# Altium PCB slave-14-mc33775.PcbDoc (part 3 of 5)
Units mil, origin at the board's own origin, x right, y up, seen from the top; angles counter-clockwise.
Board outline 6512.5 x 4562.01 mil, 6 copper layers (Top Copper, Supply, Signal Layer 1, Signal Layer 2, GND, Bot Copper), stack 69.773 mil thick; 427 components, 0 nets, 1131 pads, 1672 vias.
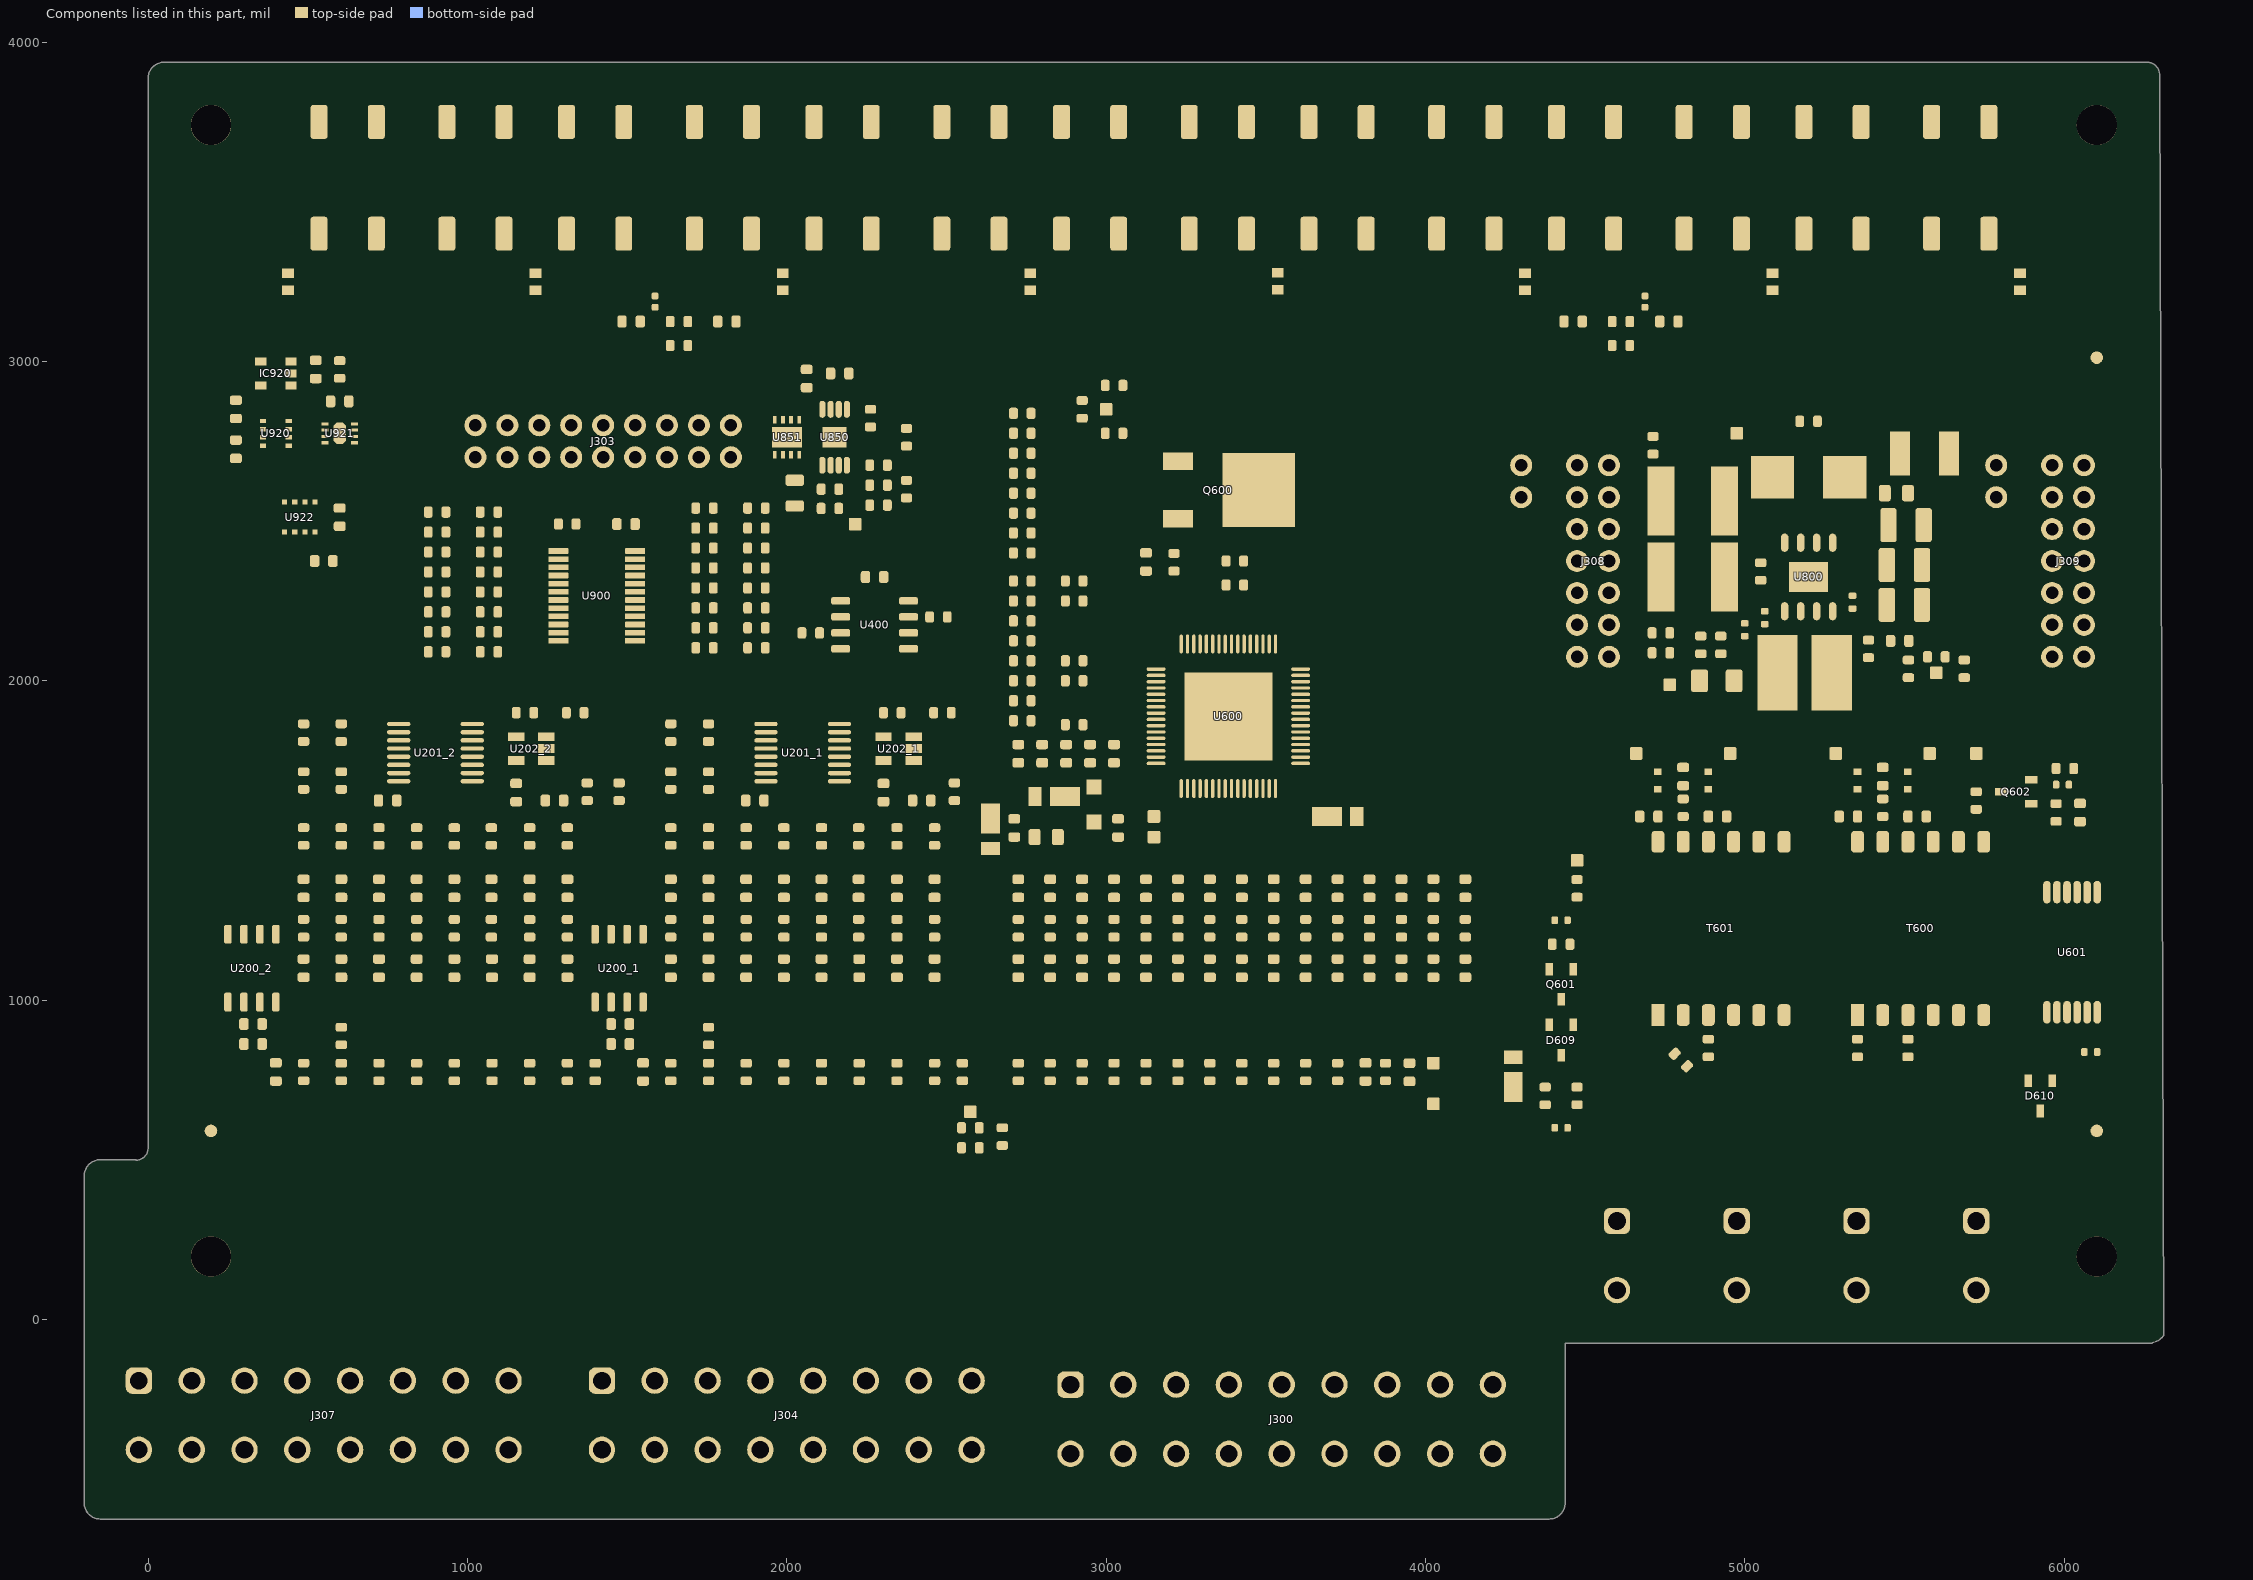
[diagram p7: the components of this part, seen from the top]

## Via types
v1: diameter 23.62, hole 15.75, Top Copper to Bot Copper, 1585 vias
v2: diameter 19.68, hole 11.81, Top Copper to Bot Copper, 87 vias

## Nets (pads, with @x,y where several pads share a name; then routed paths per layer and width w, separated by ;. In a path a pad name is that pad's centre, name@x,y a point inside that pad or via, vN(x,y) a via of type N, cw(c..) or ccw(c..) an arc to the next point about the centre after c; other vN are vias at no path point) (continued)
copper on no net: | length 362824.7
  Top Copper w8: 359.65,2736.61 345.8,2736.61 344.92,2737.5 v2(312.5,2737.5) 330.86,2755.86 330.86,2761.96 356.69,2787.8 359.65,2787.8 ; 440.35,2813.39 454.2,2813.39 455.08,2812.5 v2(487.5,2812.5) ; 447.24,2999.9 468.96,2999.9 488.08,2980.78 542.69,2980.78 564.47,3002.56 600,3002.56 ; v1(512.5,2775) 522.34,2784.84 553.94,2784.84 ; 553.94,2804.53 553.94,2834.78 571.46,2852.3 571.46,2875 ; 646.06,2784.84 709.84,2784.84 v1(725,2800) ; 2575,650 2575,588.79 2602.56,561.23 2602.56,537.5 ; 2725,1321.46 2747.7,1321.46 2782.61,1356.36 2782.61,1403.78 2817.52,1438.69 2900.54,1438.69 2940.47,1478.61 3187.29,1478.61 3255.02,1546.35 3255.02,1662.5 ; 2825,1321.46 2847.7,1321.46 2896.57,1370.33 2896.57,1417.74 2945.44,1466.61 3192.26,1466.61 3274.7,1549.06 3274.7,1662.5 ; 2925,1321.46 2947.7,1321.46 2990.57,1364.33 2990.57,1411.74 3033.44,1454.61 3197.23,1454.61 3294.39,1551.77 3294.39,1662.5 ; 2986.22,1898.72 3156.59,1898.72 ; v1(3002.34,1922.53) 3052.47,1922.53 3056.59,1918.41 3156.59,1918.41 ; 3025,1321.46 3047.7,1321.46 3084.57,1358.33 3084.57,1405.74 3121.44,1442.61 3202.2,1442.61 3314.07,1554.49 3314.07,1662.5 ; v1(3037.5,1975.81) 3061.69,1975.81 3079.72,1957.78 3156.59,1957.78 ; 3037.5,2025 3085.04,1977.46 3156.59,1977.46 ; 3043.5,2075 3101.67,2016.83 3156.59,2016.83 ; 3050,1950 3061.91,1938.09 3156.59,1938.09 ; 3050,2044.16 3097.02,1997.15 3156.59,1997.15 ; 3100,2050 3113.48,2036.52 3156.59,2036.52 ; 3125,1321.46 3147.7,1321.46 3198.3,1372.05 3198.3,1421.74 3333.76,1557.2 3333.76,1662.5 ; v1(3212.5,1537.5) 3235.33,1560.33 3235.33,1662.5 ; 3224.12,2050.88 3236.18,2062.93 3236.18,2088.34 3235.84,2088.68 3235.84,2114.75 3235.33,2115.26 ; 3225,1321.46 3247.7,1321.46 3298.3,1372.05 3298.3,1476.99 3353.44,1532.14 3353.44,1662.5 ; 3239.68,2035.32 3254.18,2049.82 3254.18,2088.34 3254.52,2088.68 3254.52,2114.75 3255.02,2115.26 ; 3274.63,2168.89 3275,2168.52 3275,2121.46 ; 3294.63,2115.26 3294.63,2180.37 ; 3325,1321.46 3347.7,1321.46 3373.13,1346.89 3373.13,1662.5 ; 3392.82,1662.5 3392.82,1330.94 3402.3,1321.46 3425,1321.46 ; 3412.5,1662.5 3412.5,1524.16 3451.7,1484.96 3451.7,1372.05 3502.3,1321.46 3525,1321.46 ; 3432.19,1662.5 3432.19,1564.32 3551.7,1444.81 3551.7,1372.05 3602.3,1321.46 3625,1321.46 ; 3451.87,1662.5 3451.87,1619.3 3651.7,1419.47 3651.7,1372.05 3702.3,1321.46 3725,1321.46 ; 3471.56,1662.5 3471.56,1618.86 3619.38,1471.03 3700.14,1471.03 3767.74,1403.44 3767.74,1356.02 3802.3,1321.46 3825,1321.46 ; 3491.24,1662.5 3491.24,1616.14 3624.35,1483.03 3788.14,1483.03 3867.74,1403.44 3867.74,1356.02 3902.3,1321.46 3925,1321.46 ; 3510.93,1662.5 3510.93,1613.43 3629.32,1495.03 3876.14,1495.03 3968.58,1402.59 3968.58,1355.17 4002.3,1321.46 4025,1321.46 ; 3530.61,1662.5 3530.61,1610.72 3634.29,1507.03 3964.14,1507.03 4067.83,1403.35 4067.83,1355.93 4102.3,1321.46 4125,1321.46
  Top Copper w12: v1(241.04,2821.46) 275,2821.46 317.66,2821.46 325.73,2813.39 359.65,2813.39 385.06,2813.39 410.65,2787.8 ; 359.65,2762.2 385.06,2762.2 410.65,2787.8 ; v1(412.01,2400) 427.76,2415.75 427.76,2465.26 ; 427.76,2559.74 459.25,2559.74 459.25,2515.75 490.75,2484.25 490.75,2465.26 490.75,2453.38 v2(521.46,2422.67) 521.46,2375 ; 440.35,2787.8 410.65,2787.8 ; 459.25,2465.26 459.25,2415.75 v1(475,2400) ; 490.75,2559.74 490.75,2534.25 522.24,2502.76 522.24,2465.26 558.6,2465.26 577.3,2483.96 600,2483.96 ; 522.24,2559.74 534.12,2559.74 552.82,2541.04 600,2541.04 670.58,2541.04 686.62,2525 v1(750,2525) ; 578.54,2375 578.54,2443.74 600,2465.19 600,2483.96 ; 646.06,2765.16 709.84,2765.16 v2(725,2750) ; v1(750,2483.96) 600,2483.96 ; 1039.86,2090.75 1039.86,2094.68 1070.71,2125.53 1145.48,2125.53 1170.76,2150.81 1245.53,2150.81 1245.75,2150.59 1284.84,2150.59 ; 1039.86,2153.25 1039.86,2157.18 1063.64,2180.96 1159.1,2180.96 1163.89,2176.18 1284.84,2176.18 ; 1039.86,2215.75 1039.86,2219.68 1063.64,2243.46 1140.65,2243.46 1182.34,2201.77 1284.84,2201.77 ; 1039.86,2278.25 1039.86,2282.18 1063.64,2305.96 1137.72,2305.96 1216.33,2227.36 1284.84,2227.36 ; 1039.86,2340.75 1039.86,2344.68 1063.64,2368.46 1137.72,2368.46 1161.03,2345.16 1161.03,2341.27 1249.35,2252.95 1284.84,2252.95 ; 1039.86,2403.25 1039.86,2407.18 1063.64,2430.96 1137.72,2430.96 1177.03,2391.66 1177.03,2350.86 1249.35,2278.54 1284.84,2278.54 ; 1039.86,2465.75 1039.86,2469.68 1063.64,2493.46 1137.72,2493.46 1193.03,2438.16 1193.03,2360.45 1249.35,2304.13 1284.84,2304.13 ; 1039.86,2528.25 1039.86,2532.18 1063.64,2555.96 1137.72,2555.96 1209.03,2484.66 1209.03,2370.04 1249.35,2329.72 1284.84,2329.72 ; v1(1234.84,2125) 1284.84,2125 ; v1(1234.84,2380.91) 1284.84,2380.91 ; 1467.91,2490.75 v1(1467.91,2524.7) ; 1525,2125 1622.65,2125 1672.12,2075.53 1746.2,2075.53 1769.98,2099.31 1769.98,2103.25 ; 1525,2150.59 1642.07,2150.59 1654.63,2138.03 1746.2,2138.03 1769.98,2161.81 1769.98,2165.75 ; 1525,2176.18 1654.84,2176.18 1675.17,2196.51 1742.18,2196.51 1769.98,2224.31 1769.98,2228.25 ; 1525,2201.77 1626.77,2201.77 1655.09,2230.09 1655.09,2238.94 1670.21,2254.06 1679.06,2254.06 1680.96,2255.96 1739.13,2255.96 1769.98,2286.81 1769.98,2290.75 ; 1525,2227.36 1577.02,2227.36 1648.81,2299.15 1648.81,2357.66 1672.12,2380.96 1746.2,2380.96 1769.98,2357.18 1769.98,2353.25 ; 1525,2252.95 1579.99,2252.95 1632.81,2305.78 1632.81,2404.16 1672.12,2443.46 1746.2,2443.46 1769.98,2419.68 1769.98,2415.75 ; 1525,2278.54 1582.95,2278.54 1616.81,2312.41 1616.81,2450.66 1672.12,2505.96 1746.2,2505.96 1769.98,2482.18 1769.98,2478.25 ; 1525,2304.13 1564.09,2304.13 1564.31,2303.91 1585.69,2303.91 1600.81,2319.03 1600.81,2497.16 1672.12,2568.46 1746.2,2568.46 1769.98,2544.68 1769.98,2540.75 ; 1525,2329.72 v1(1575,2329.72) ; v1(2013.68,2675) 2013.68,2707.38 ; 2381.3,2200 2447.44,2200 ; 2547.44,537.5 2547.44,578.28 2547.44,600 ; 2602.56,600 2675,600 ; v1(2818.75,1875) 2842.47,1898.72 2986.22,1898.72 ; v1(2818.75,2000) 2869.56,1949.19 2973.19,1949.19 2974,1950 3050,1950 ; v1(2818.75,2125) 2937.5,2125 3037.5,2025 ; v1(2818.75,2187.5) 2906.66,2187.5 3050,2044.16 ; v1(2837.5,1837.5) 2843.97,1843.97 2857.85,1843.97 2872.44,1858.56 2872.44,1862.5 ; 2872.44,2250 2872.44,2246.06 3043.5,2075 ; 2927.56,2000 2927.56,1996.06 2946.69,1976.93 2960.57,1976.93 v1(2962.5,1975) ; 2927.56,2062.5 2927.56,2058.56 2973.62,2012.5 v1(3000,2012.5) ; 2950,1800.3 2981.72,1800.3 3006.48,1825.06 3063.44,1825.06 3068.52,1819.98 3156.59,1819.98 ; 3000,2850 3052.56,2902.56 3052.56,2925 v1(3080.45,2925) ; 3052.56,2775 v1(3080.45,2775) ; v1(3075,1725) 3075,1741.24 ; v1(3075,1850) v1@3076.69,1850 ; v1(3155.89,2263.23) 3155.89,2260.08 3161.69,2254.28 3161.69,2251.81 3176.81,2236.69 3207.2,2236.69 3274.63,2169.26 3274.63,2168.89 ; 3156.59,1741.24 3075,1741.24 ; 3156.59,1760.93 3075,1760.93 ; 3156.59,1780.61 3080.61,1780.61 3075,1775 3075,1760.93 ; 3156.59,1839.67 3087.03,1839.67 v1@3076.69,1850 ; 3156.59,1859.35 3087.5,1859.35 3078.14,1850 v1@3076.69,1850 ; v1(3162.5,2300) 3202.23,2300 3353.44,2148.78 3353.44,2115.26 ; v1(3187.5,2262.5) 3212.5,2262.5 3294.63,2180.37 ; v2(3193.36,1607.84) 3193.36,1609.92 3189.51,1613.76 3189.51,1615.52 3168.72,1636.32 3168.72,1687.33 3209.44,1728.06 3209.44,2036.19 3224.12,2050.88 ; v2(3212.5,1627.84) 3210.42,1627.84 3206.58,1631.68 3204.46,1631.68 3190.72,1645.43 3190.72,1678.22 3231.44,1718.94 3231.44,2027.08 3239.68,2035.32 ; v1(3362.5,2187.5) 3373.13,2176.87 3373.13,2115.26 ; 3375.57,2375 3375.57,2300 3375.57,2222.19 3392.82,2204.94 3392.82,2115.26 ; 3412.5,2115.26 3412.5,2243.75 3430.68,2261.93 3430.68,2300 ; 3432.19,2115.26 3432.19,2207.18 v1(3450,2225) ; v1@3451.87,2051.87 3451.87,2115.26 ; 3471.56,2115.26 3471.56,2195.79 3473.81,2198.04 3475,2199.23 3475,2200 ; 3491.24,2115.26 3491.24,2150.6 3499.83,2159.19 3499.83,2174.83 v1(3500,2175) ; v1@3510.93,2051.87 3510.93,2115.26 ; 3530.61,2115.26 3530.61,2148.78 3542.1,2160.28 3547.78,2160.28 3550,2162.5 ; v1@3545.96,1780.61 3609.35,1780.61 ; v1@3545.96,1839.67 3609.35,1839.67 ; v1@3545.96,1898.72 3609.35,1898.72 ; v1@3545.96,1957.78 3609.35,1957.78 ; v1@3545.96,2016.83 3609.35,2016.83 ; 3609.35,1760.93 3669.39,1760.93 v1(3678.45,1769.98) ; 3609.35,1800.3 3698.13,1800.3 3707.04,1791.39 v1(3710.19,1791.39) ; 3609.35,1819.98 3698.13,1819.98 3707.04,1828.89 v1(3710.19,1828.89) ; 3609.35,1859.35 3669.39,1859.35 3678.45,1850.3 ; 3609.35,1879.04 3669.39,1879.04 v1(3678.45,1888.09) ; 3609.35,1918.41 3698.13,1918.41 3707.04,1909.5 v1(3710.19,1909.5) ; 3609.35,1938.09 3698.13,1938.09 3707.04,1947 v1(3710.19,1947) ; 3609.35,1977.46 3669.39,1977.46 3678.45,1968.41 ; 3609.35,1997.15 3669.39,1997.15 v1(3678.45,2006.2) ; 3609.35,2036.52 3698.13,2036.52 3707.04,2027.61 v1(3710.19,2027.61) ; 4475,2275 4525,2225 4525,2062.14 4712.14,1875 5700,1875 5800,1975 5800,2148.19 5924.05,2272.24 5959.74,2272.24 5962.5,2275 ; 4575,2275 4530.55,2319.45 4444.45,2319.45 4425,2300 4425,2062.14 4637.14,1850 5912.5,1850 6112.5,2050 6112.5,2225 6062.5,2275 ; 4671.06,1575 v1(4671.06,1625) ; v1(4682.05,2087.5) 4709.94,2087.5 ; 4728.15,1715.06 v1(4728.15,1742.95) ; 4807.15,1720.08 4807.15,1728.54 v1(4807.15,1747.97) ; v1(4812.5,2000) 4858.37,2000 ; 4862.5,2140.06 v1(4862.5,2167.95) ; v1(4875,2325) 4936.91,2325 ; v1(4875,2562.5) 4936.91,2562.5 ; 4886.15,1715.06 v1(4886.15,1742.95) ; 4925,2140.06 v1(4925,2167.95) ; 4943.24,1575 v1(4943.24,1625) ; v1(4966.63,1937.5) 4966.63,2000 v1(4966.63,2062.5) ; v1(5000,2111.87) 5000,2139.76 ; v1(5050,2286.78) 5050,2314.67 ; 5200,2325 v1(5287.5,2325) ; 5275,2432.28 v1(5275,2475) ; 5296.06,1575 v1(5296.06,1625) ; 5353.15,1715.06 v1(5353.15,1742.95) ; 5432.15,1720.08 5432.15,1728.54 v1(5432.15,1747.97) ; v1@5476.28,2011.22 5477.56,2009.94 5512.5,2009.94 5561.26,2009.94 5576.32,2025 5600,2025 ; 5511.15,1715.06 v1(5511.15,1742.95) ; 5525.59,2125 v1(5562.5,2125) ; 5555.12,2237.5 v1(5600,2237.5) ; 5555.12,2362.5 v1(5600,2362.5) ; 5555.12,2487.5 v1(5600,2487.5) ; 5568.24,1575 v1(5568.24,1625) ; v1(5587.5,2712.5) 5639.27,2712.5 ; 5687.5,2009.94 5722.44,2009.94 v1@5723.72,2011.22 ; v1(5725,1569.45) 5725,1597.34 ; 5725,1772.24 v1(5725,1712.5) 5725,1652.46 5802.76,1652.46 ; v1(5837.5,2149.19) 5861.69,2125 6012.5,2125 6062.5,2175 ; 5897.24,1689.86 v1(5897.24,1717.75) ; 5975,1559.94 5975,1512.5 6072.24,1415.26 6072.24,1337.99 ; 6015.16,1675 v1(6043.05,1675) ; v1(6022.11,1558.96) 6050,1558.96 6050,1475 6103.74,1421.26 6103.74,1337.99 ; 6030.12,1725 v1(6058.01,1725) ; 6050,1616.04 v1(6050,1643.93) ; 3075,1741.24 3075,1760.93
  Top Copper w15: 721.46,1625 721.46,1664.33 699.66,1686.13 699.66,1736.86 725,1762.2 784.84,1762.2 ; v2(725,1711.02) 784.84,1711.02 ; v2(725,1813.39) 784.84,1813.39 ; v2(725,1864.57) 784.84,1864.57 ; 784.84,1685.43 v2(844.69,1685.43) ; 784.84,1736.61 v2(844.69,1736.61) ; 784.84,1787.8 v2(844.69,1787.8) ; 784.84,1838.98 v2(844.69,1838.98) ; 955.32,1736.61 1015.16,1736.61 ; v2(955.32,1787.8) 1015.16,1787.8 ; v2(955.32,1838.98) 1015.16,1838.98 ; 1015.16,1711.02 v2(1075,1711.02) ; 1015.16,1762.2 v2(1075,1762.2) ; 1015.16,1813.39 v2(1075,1813.39) ; 1015.16,1864.57 v2(1075,1864.57) ; 1152.76,1678.54 1152.76,1750.1 ; 1207.87,1900 1250,1900 ; 1247.24,1824.9 v2(1247.24,1864.57) 1247.24,1897.24 1250,1900 ; 1309.94,1900 1250,1900 ; v2(1837.5,1862.5) 1838.77,1862.5 1840.83,1864.57 1934.84,1864.57 ; 1871.46,1625 1871.46,1664.33 1849.66,1686.13 1849.66,1736.86 1875,1762.2 1934.84,1762.2 ; v2(1875,1711.02) 1934.84,1711.02 ; v2(1875,1813.39) 1934.84,1813.39 ; 1934.84,1685.43 v2(1994.69,1685.43) ; 1934.84,1736.61 v2(1994.69,1736.61) ; 1934.84,1787.8 v2(1994.69,1787.8) ; 1934.84,1838.98 v2(1994.69,1838.98) ; 2105.32,1685.43 2165.16,1685.43 ; 2105.32,1736.61 2165.16,1736.61 ; v2(2105.32,1787.8) 2165.16,1787.8 ; v2(2105.32,1838.98) 2165.16,1838.98 ; 2165.16,1711.02 v2(2225,1711.02) ; 2165.16,1762.2 v2(2225,1762.2) ; 2165.16,1813.39 v2(2225,1813.39) ; 2165.16,1864.57 v2(2225,1864.57) ; 2302.76,1678.54 2302.76,1750.1 ; 2357.87,1900 2400,1900 ; 2397.24,1824.9 v2(2397.24,1864.57) 2397.24,1897.24 2400,1900 ; 2459.94,1900 2400,1900
  Top Copper w16: -28.74,-408.27 134.46,-245.07 173.2,-245.07 279.87,-138.39 301.73,-138.39 536.52,96.39 536.52,802.56 ; 136.61,-408.27 299.81,-245.07 324.06,-245.07 393.98,-175.15 393.98,-161.35 605,49.66 605,370 654.51,419.51 654.51,802.56 ; v1(241.04,2753.54) 275,2753.54 ; v1@269.78,862.5 300,862.5 300,925 300,993.7 ; v1(275,2662.5) 275,2696.46 ; 275,2878.54 v1(275,2912.5) ; v1(300,2999.9) 300.1,2999.9 352.76,2999.9 ; 301.97,-408.27 302,-408.23 353.46,-408.23 579.34,-182.35 579.34,-169.64 698.97,-50.01 698.97,321.79 783.97,406.79 783.97,789.84 ; 350,1206.3 v1(350,1300) ; v1@351.38,2888.88 352.76,2890.26 352.76,2925.1 ; 357.09,862.5 v1@387.3,862.5 ; 357.09,925 v1@387.3,925 ; v1@400,716.24 400,746.46 ; 400,803.54 v1@400,833.76 ; 400,993.7 v1@430.22,993.7 ; v1(400,2737.5) 425.63,2737.5 426.51,2736.61 440.35,2736.61 ; v1(413.29,2962.5) 447.24,2962.5 ; 440.35,2762.2 475.3,2762.2 487.5,2750 v1(487.5,2712.5) ; 447.24,2925.1 480.94,2925.1 502.3,2946.46 525,2946.46 ; 467.32,-408.27 630.52,-245.07 654.77,-245.07 724.69,-175.15 724.69,-161.35 840.98,-45.06 840.98,370 890.49,419.51 890.49,802.56 ; v1@487.01,717.22 487.01,747.44 ; 487.01,802.56 536.52,802.56 ; 487.01,1128.54 v1@487.01,1158.76 ; 487.01,1197.44 461.14,1197.44 450,1186.3 450,1084.28 462.82,1071.46 487.01,1071.46 487.01,973.92 536.52,924.41 536.52,802.56 ; 487.01,1252.56 487.01,1318.75 ; 487.01,1321.46 539.64,1321.46 549.02,1330.83 v1(549.02,1425) 549.02,1475 539.07,1484.94 487.01,1484.94 ; 487.01,1390.35 v1@487.01,1424.51 ; v1@487.01,1625.79 487.01,1659.94 ; 487.01,1715.06 v2(487.01,1762.5) 487.01,1809.94 ; 487.01,1865.06 v1@487.01,1899.21 ; v1(525,2912.5) 525,2946.46 ; 525,3003.54 v1(525,3037.5) ; v1(537.5,2875) 571.46,2875 ; v1(600,2913.48) 600,2947.44 548.69,2947.44 547.7,2946.46 525,2946.46 ; 600,3002.56 706.03,3002.56 955.04,2753.55 1071.45,2753.55 1125,2700 ; v1@605,717.22 605,747.44 ; 605,802.56 654.51,802.56 ; 605,1128.54 v1@605,1158.76 ; 605,1197.44 579.13,1197.44 567.99,1186.3 567.99,1084.28 580.81,1071.46 605,1071.46 605,973.92 654.51,924.41 654.51,802.56 ; 605,1252.56 605,1318.75 ; 605,1321.46 657.64,1321.46 667.01,1330.83 v1(667.01,1425) 667.01,1475 657.07,1484.94 605,1484.94 ; 605,1390.35 v1@605,1424.51 ; v1@605,1625.79 605,1659.94 ; 605,1715.06 606.12,1715.06 605.56,1715.62 605,1716.18 v2(605,1763.06) 605,1809.94 ; 605,1865.06 v1@605,1899.21 ; 628.54,2875 v1(662.5,2875) ; 632.68,-408.27 691.73,-408.27 900,-200 900,310.98 1008.52,419.51 1008.52,802.56 ; 646.06,2745.47 651.97,2745.47 684.94,2712.5 v1(725,2712.5) ; 646.06,2804.53 679.53,2804.53 v1(725,2850) 784.69,2790.31 784.69,2425.98 792.13,2418.54 v1(792.13,2352.69) ; v1@687.3,1625 721.46,1625 ; v1@722.99,717.22 722.99,747.44 ; 722.99,802.56 726.93,802.56 739.65,789.84 783.97,789.84 ; 722.99,1128.54 v1@722.99,1158.76 ; 722.99,1197.44 719.06,1197.44 713.28,1191.66 713.28,1188.87 692.29,1167.88 692.29,1092.75 706.83,1078.22 716.23,1078.22 722.99,1071.46 726.93,1071.46 733.69,1064.69 733.69,1056.09 734.46,1055.32 734.46,961.2 783.97,911.69 783.97,789.84 ; 722.99,1252.56 722.99,1318.75 ; 722.99,1321.46 771.46,1321.46 785,1335 v1(785,1425) 785,1475 775.06,1484.94 722.99,1484.94 ; 722.99,1390.35 v1@722.99,1424.51 ; 778.54,1625 v1@812.7,1625 ; 798.03,-408.27 961.23,-245.07 985.48,-245.07 1075.4,-155.15 1075.4,368.39 1126.52,419.51 1126.52,802.56 ; v1@840.98,717.22 840.98,747.44 ; 840.98,802.56 890.49,802.56 ; 840.98,1128.54 v1@840.98,1158.76 ; 840.98,1197.44 815.12,1197.44 803.98,1186.3 803.98,1084.28 816.8,1071.46 840.98,1071.46 840.98,973.92 890.49,924.41 890.49,802.56 ; 840.98,1252.56 840.98,1318.75 ; 840.98,1321.46 890.21,1321.46 902.99,1334.24 v1(902.99,1425) 902.99,1475 893.05,1484.94 840.98,1484.94 ; 840.98,1390.35 v1@840.98,1424.51 ; v1(843.41,2090.75) 877.36,2090.75 ; v1(843.41,2153.25) 877.36,2153.25 ; v1(843.41,2215.75) 877.36,2215.75 ; v1(843.41,2278.25) 877.36,2278.25 ; v1(843.41,2340.75) 877.36,2340.75 ; v1(843.41,2403.25) 877.36,2403.25 ; v1(843.41,2465.75) 877.36,2465.75 ; v1(843.41,2528.25) 877.36,2528.25 ; 932.48,2090.75 v1(986.17,2090.75) 1039.86,2090.75 ; 932.48,2153.25 v1(986.17,2153.25) 1039.86,2153.25 ; 932.48,2215.75 v1(986.17,2215.75) 1039.86,2215.75 ; 932.48,2278.25 v1(986.17,2278.25) 1039.86,2278.25 ; 932.48,2340.75 v1(986.17,2340.75) 1039.86,2340.75 ; 932.48,2403.25 v1(986.17,2403.25) 1039.86,2403.25 ; 932.48,2465.75 v1(986.17,2465.75) 1039.86,2465.75 ; 932.48,2528.25 v1(986.17,2528.25) 1039.86,2528.25 ; 955.32,1736.61 925,1766.93 v1(925,1900) 1035.67,1900 1185.67,2050 1375,2050 1412.5,2087.5 v1(1412.5,2375) 1414.56,2375 1420.47,2380.91 1525,2380.91 ; v1@959.02,717.22 959.02,747.44 ; 959.02,802.56 1008.52,802.56 ; 959.02,1128.54 v1@959.02,1158.76 ; 959.02,1197.44 933.15,1197.44 922.01,1186.3 922.01,1084.28 934.83,1071.46 959.02,1071.46 959.02,973.92 1008.52,924.41 1008.52,802.56 ; 959.02,1252.56 959.02,1318.75 ; 959.02,1321.46 1008.96,1321.46 1021.02,1333.52 v1(1021.02,1425) 1021.02,1475 1011.08,1484.94 959.02,1484.94 ; 959.02,1390.35 v1@959.02,1424.51 ; 963.39,-408.27 1126.58,-245.07 1150.83,-245.07 1195,-200.9 1195,370 1244.51,419.51 1244.51,802.56 ; 1015.16,1685.43 1064.04,1685.43 1064.3,1685.18 1085.7,1685.18 1112.5,1711.98 v1(1112.5,1937.5) 1192.11,2017.11 1370.39,2017.11 1450,2096.72 v1(1450,2312.5) 1451.46,2313.96 1451.46,2317.27 1489.5,2355.31 1525,2355.31 ; 1075,1252.56 1075,1318.75 ; 1075,1321.46 1127.64,1321.46 1137.01,1330.83 v1(1137.01,1425) 1137.01,1475 1127.07,1484.94 1075,1484.94 ; 1075,1390.35 v1@1075,1424.51 ; v1@1077.01,717.22 1077.01,747.44 ; 1077.01,802.56 1126.52,802.56 ; 1077.01,1128.54 v1@1077.01,1158.76 ; 1077.01,1197.44 1075,1197.44 1051.14,1197.44 1040,1186.3 1040,1084.28 1052.82,1071.46 1077.01,1071.46 1077.01,973.92 1126.52,924.41 1126.52,802.56 ; 1094.98,2090.75 v1(1128.94,2090.75) ; 1094.98,2153.25 v1(1128.94,2153.25) ; 1094.98,2215.75 v1(1128.94,2215.75) ; 1094.98,2278.25 v1(1128.94,2278.25) ; 1094.98,2340.75 v1(1128.94,2340.75) ; 1094.98,2403.25 v1(1128.94,2403.25) ; 1094.98,2465.75 v1(1128.94,2465.75) ; 1094.98,2528.25 v1(1128.94,2528.25) ; v1@1118.6,1621.46 1152.76,1621.46 ; 1128.74,-408.27 1312.99,-224.02 1312.99,370 1362.5,419.51 1362.5,802.56 ; 1152.76,1678.54 v1@1186.91,1678.54 ; 1152.76,1900 1152.76,1824.9 1182.35,1824.9 1204.69,1802.56 1204.69,1763.07 1217.65,1750.1 1247.24,1750.1 ; v1@1195,717.22 1195,747.44 ; 1195,802.56 1244.51,802.56 ; 1195,1128.54 v1@1195,1158.76 ; 1195,1197.44 1169.13,1197.44 1157.99,1186.3 1157.99,1084.28 1170.81,1071.46 1195,1071.46 1195,973.92 1244.51,924.41 1244.51,802.56 ; 1195,1252.56 1195,1318.75 ; 1195,1321.46 1246.46,1321.46 1257.01,1332.01 v1(1257.01,1425) 1257.01,1475 1247.07,1484.94 1195,1484.94 ; 1195,1390.35 v1@1195,1424.51 ; v1(1195,1625) 1232.28,1625 ; v1(1199.19,2587.5) 1231,2555.69 1231,2437.7 1261.35,2407.35 1283.98,2407.35 1284.84,2406.5 ; 1247.24,1787.5 1325,1787.5 v1(1350,1812.5) ; 1250,1750.1 1247.24,1750.1 ; 1284.84,2355.31 1330.32,2355.31 1343.37,2368.37 1343.37,2428.28 1284.84,2486.81 1284.84,2490.75 ; 1302.85,1625 1375,1625 1475,1625 v1(1475,1587.5) ; v1@1312.5,1425 1312.99,1424.51 1312.99,1390.35 ; v1@1312.99,717.22 1312.99,747.44 ; 1312.99,802.56 1362.5,802.56 ; 1312.99,1128.54 v1@1312.99,1158.76 ; 1312.99,1197.44 1287.12,1197.44 1275.98,1186.3 1275.98,1084.28 1288.8,1071.46 1312.99,1071.46 1312.99,973.92 1362.5,924.41 1362.5,802.56 ; 1312.99,1252.56 1312.99,1318.75 ; 1312.99,1321.46 1365.21,1321.46 1375,1331.25 v1(1375,1425) 1375,1475 1365.06,1484.94 1312.99,1484.94 ; 1339.96,2490.75 v1(1339.96,2524.7) ; 1375,1680.12 1282.38,1680.12 1247.24,1715.26 1247.24,1750.1 ; v1@1400,717.22 1400,747.44 ; v1@1419.78,862.5 1450,862.5 1450,925 1450,993.7 ; 1421.26,-408.27 1421.26,-278.74 1454.93,-245.07 1455.46,-245.07 1474.6,-225.93 1474.6,-225.4 1637.5,-62.5 1637.5,370.49 1686.52,419.51 1686.52,802.56 ; v2(1450,3125) 1483.96,3125 1483.96,3171.46 v2(1487.5,3175) ; 1475,1680.12 1475,1800 1637.5,1962.5 2123.17,1962.5 2125.98,1959.69 2211.52,1959.69 2214.33,1962.5 2456.5,1962.5 2515.06,1903.94 2515.06,1900 ; 1500,1206.3 v1(1500,1300) ; 1507.09,862.5 v1@1537.3,862.5 ; 1507.09,925 v1@1537.3,925 ; 1525,2406.5 1525,2490.75 v1(1525,2524.7) ; 1541.04,3125 1587.5,3125 ; v1@1550,716.24 1550,746.46 ; 1550,803.54 v1@1550,833.76 ; 1550,993.7 v1@1580.22,993.7 ; 1586.61,-408.27 1586.61,-300.89 1687.5,-200 1687.5,-102.31 ; 1587.5,3169.78 1587.5,3125 ; 1634.94,3050 1634.94,3103.28 1634.94,3125 1587.5,3125 ; v1@1637.01,717.22 1637.01,747.44 ; 1637.01,802.56 1686.52,802.56 ; 1637.01,1128.54 v1@1637.01,1158.76 ; 1637.01,1197.44 1611.14,1197.44 1600,1186.3 1600,1084.28 1612.82,1071.46 1637.01,1071.46 1637.01,973.92 1686.52,924.41 1686.52,802.56 ; 1637.01,1252.56 1637.01,1318.75 ; 1637.01,1321.46 1689.64,1321.46 1699.02,1330.83 v1(1699.02,1425) 1699.02,1475 1689.07,1484.94 1637.01,1484.94 ; 1637.01,1390.35 v1@1637.01,1424.51 ; 1637.01,1540.06 v1@1637.01,1574.21 ; v1@1637.01,1625.79 1637.01,1659.94 ; 1637.01,1715.06 v2(1637.01,1762.5) 1637.01,1809.94 ; 1637.01,1865.06 v1@1637.01,1899.21 ; v1(1680.91,2103.25) 1714.86,2103.25 ; v1(1680.91,2165.75) 1714.86,2165.75 ; v1(1680.91,2228.25) 1714.86,2228.25 ; v1(1680.91,2290.75) 1714.86,2290.75 ; v1(1680.91,2353.25) 1714.86,2353.25 ; v1(1680.91,2415.75) 1714.86,2415.75 ; v1(1680.91,2478.25) 1714.86,2478.25 ; v1(1680.91,2540.75) 1714.86,2540.75 ; 1687.5,-100 1687.5,302.5 1804.51,419.51 1804.51,802.56 ; 1690.06,3125 v1(1739.23,3125) 1783.96,3125 ; v1(1700,1909.69) 1700,1629.7 1755,1574.7 ; 1751.97,-408.27 1863.98,-296.25 1863.98,360.99 1922.5,419.51 1922.5,802.56 ; v1@1755,717.22 1755,747.44 ; 1755,802.56 1804.51,802.56 ; 1755,1128.54 v1@1755,1158.76 ; 1755,1197.44 1729.13,1197.44 1717.99,1186.3 1717.99,1084.28 1730.81,1071.46 1755,1071.46 1755,973.92 1804.51,924.41 1804.51,802.56 ; 1755,1252.56 1755,1318.75 ; 1755,1321.46 1807.64,1321.46 1817.01,1330.83 v1(1817.01,1425) 1817.01,1475 1807.07,1484.94 1755,1484.94 ; 1755,1390.35 v1@1755,1424.51 ; 1755,1540.06 1755,1574.21 ; v1@1755,1625.79 1755,1659.94 ; 1755,1715.06 1756.12,1715.06 1755.56,1715.62 1755,1716.18 v2(1755,1763.06) 1755,1809.94 ; 1755,1865.06 v1@1755,1899.21 ; 1769.98,2103.25 v1(1823.67,2103.25) 1877.36,2103.25 ; 1769.98,2165.75 v1(1823.67,2165.75) 1877.36,2165.75 ; 1769.98,2228.25 v1(1823.67,2228.25) 1877.36,2228.25 ; 1769.98,2290.75 v1(1823.67,2290.75) 1877.36,2290.75 ; 1769.98,2353.25 v1(1823.67,2353.25) 1877.36,2353.25 ; 1769.98,2415.75 v1(1823.67,2415.75) 1877.36,2415.75 ; 1769.98,2478.25 v1(1823.67,2478.25) 1877.36,2478.25 ; 1769.98,2540.75 v1(1823.67,2540.75) 1877.36,2540.75 ; v1@1837.3,1625 1871.46,1625 ; 1841.04,3125 v2(1875,3125) ; v1(1862.5,2000) 1898.94,2036.44 2450.77,2036.44 2601.83,2187.5 2709.94,2187.5 ; v1@1872.99,717.22 1872.99,747.44 ; 1872.99,802.56 1922.5,802.56 ; 1872.99,1128.54 v1@1872.99,1158.76 ; 1872.99,1197.44 1847.12,1197.44 1835.98,1186.3 1835.98,1084.28 1848.8,1071.46 1872.99,1071.46 1872.99,973.92 1922.5,924.41 1922.5,802.56 ; 1872.99,1252.56 1872.99,1318.75 ; 1872.99,1321.46 1925.63,1321.46 1935,1330.83 v1(1935,1425) 1935,1475 1925.06,1484.94 1872.99,1484.94 ; 1872.99,1390.35 v1@1872.99,1424.51 ; 1872.99,1540.06 v1@1872.99,1574.21 ; 1917.32,-408.27 1990.98,-334.61 1990.98,370 2040.49,419.51 2040.49,802.56 ; 1928.54,1625 v1@1962.7,1625 ; 1932.48,2103.25 v1(1966.44,2103.25) ; 1932.48,2165.75 v1(1966.44,2165.75) ; 1932.48,2228.25 v1(1966.44,2228.25) ; 1932.48,2290.75 v1(1966.44,2290.75) ; 1932.48,2353.25 v1(1966.44,2353.25) ; 1932.48,2415.75 v1(1966.44,2415.75) ; 1932.48,2478.25 v1(1966.44,2478.25) ; 1932.48,2540.75 v1(1966.44,2540.75) ; v1(1950,2850.1) v1@1950.05,2850.05 ; v1@1950.1,2850.1 v1@1950.05,2850.05 ; 1962.5,2707.38 1962.5,2679.53 2014.17,2627.85 2025,2627.85 2062.04,2627.85 2089.9,2600 2107.68,2600 ; 1962.5,2817.62 1962.5,2833.43 1951.46,2844.47 1951.46,2848.64 v1@1950.05,2850.05 ; v1(1987.5,2000) 2002.81,2015.31 2565.31,2015.31 2675,2125 2709.94,2125 ; v1@1990.98,717.22 1990.98,747.44 ; 1990.98,802.56 2040.49,802.56 ; 1990.98,1128.54 v1@1990.98,1158.76 ; 1990.98,1197.44 1965.12,1197.44 1953.98,1186.3 1953.98,1084.28 1966.8,1071.46 1990.98,1071.46 1990.98,973.92 2040.49,924.41 2040.49,802.56 ; 1990.98,1252.56 1990.98,1318.75 ; 1990.98,1321.46 2043.62,1321.46 2052.99,1330.83 v1(2052.99,1425) 2052.99,1475 2043.05,1484.94 1990.98,1484.94 ; 1990.98,1390.35 v1@1990.98,1424.51 ; 1990.98,1540.06 v1@1990.98,1574.21 ; v1(2012.5,2975) 2062.5,2975 ; v1(2025,1925) 2025,1765.75 2105.32,1685.43 ; v1(2025,2513.19) 2025,2547.15 ; 2039.27,2817.62 2053.06,2817.62 2060.44,2825 v1(2062.5,2825) ; 2047.44,2150 v1(2047.44,2183.96) ; v1(2062.5,1887.5) 2062.5,1801.83 2079.47,1784.86 2079.47,1762.46 2105.32,1736.61 ; 2062.5,2917.91 2062.5,2875 v1(2087.5,2850) 2097.67,2850 2097.77,2850.1 2111.61,2850.1 ; 2082.68,-408.27 2109.02,-381.93 2136.01,-381.93 2136.01,-169.64 2109.02,-142.64 2109.02,370 2158.52,419.51 2158.52,802.56 ; 2102.56,2150 2168.7,2150 ; 2107.38,2539.79 2107.53,2539.94 ; 2107.53,2599.85 2107.68,2600 ; v1@2109.02,717.22 2109.02,747.44 ; 2109.02,802.56 2158.52,802.56 ; 2109.02,1128.54 v1@2109.02,1158.76 ; 2109.02,1197.44 2083.15,1197.44 2072.01,1186.3 2072.01,1084.28 2084.83,1071.46 2109.02,1071.46 2109.02,973.92 2158.52,924.41 2158.52,802.56 ; 2109.02,1252.56 2109.02,1321.46 ; 2109.02,1325 2109.02,1321.46 ; 2109.02,1390.35 v1@2109.02,1424.51 ; 2109.02,1484.94 2161.08,1484.94 2171.02,1475 v1(2171.02,1425) 2171.02,1333.52 2158.96,1321.46 2109.02,1321.46 ; 2109.02,1540.06 v1@2109.02,1574.21 ; 2111.61,2674.9 2111.61,2625.65 2107.68,2621.72 2107.68,2600 ; v1(2125,2100) 2168.7,2100 ; v1(2125,2200) 2168.7,2200 ; v1(2125,2250) 2168.7,2250 ; 2137.2,2850.1 2137.2,2962.5 ; 2162.8,2600 v1(2162.8,2637.45) 2162.8,2674.9 ; 2188.39,2674.9 v1(2223.33,2674.9) ; 2188.39,2850.1 2262.5,2850.1 ; 2194.29,2962.5 v1(2225,2962.5) ; v1(2202.76,2325) 2246.46,2325 ; 2225,1252.56 2225,1318.75 ; 2225,1321.46 2277.64,1321.46 2287.01,1330.83 v1(2287.01,1425) 2287.01,1475 2277.07,1484.94 2225,1484.94 ; 2225,1390.35 v1@2225,1424.51 ; 2225,1540.06 v1@2225,1574.21 ; v1@2227.01,717.22 2227.01,747.44 ; 2227.01,802.56 2276.52,802.56 ; 2227.01,1128.54 v1@2227.01,1158.76 ; 2227.01,1197.44 2225,1197.44 2201.14,1197.44 2190,1186.3 2190,1084.28 2202.82,1071.46 2227.01,1071.46 2227.01,973.92 2276.52,924.41 2276.52,802.56 ; 2248.03,-408.27 2227.01,-387.24 2194.69,-387.24 2194.69,-169.64 2227.01,-137.32 2227.01,370 2276.52,419.51 2276.52,802.56 ; 2259.94,2550 2259.94,2612.5 ; v1(2262.5,2760.04) 2262.5,2794.98 ; v1@2268.6,1621.46 2302.76,1621.46 ; 2302.76,1678.54 v1@2336.91,1678.54 ; 2302.76,1900 2302.76,1824.9 2332.35,1824.9 2354.69,1802.56 2354.69,1763.07 2367.65,1750.1 2397.24,1750.1 ; v1(2303.54,2358.96) 2303.54,2325 2365.63,2325 2381.3,2309.33 2381.3,2250 ; 2315.06,2550 2315.06,2465.06 2287.5,2437.5 2137.5,2437.5 2107.68,2467.32 2107.68,2539.79 2107.68,2600 ; 2315.06,2612.5 2315.06,2675 ; v1@2345,717.22 2345,747.44 ; 2345,802.56 2394.51,802.56 ; 2345,1128.54 v1@2345,1158.76 ; 2345,1197.44 2319.13,1197.44 2307.99,1186.3 2307.99,1084.28 2320.81,1071.46 2345,1071.46 2345,973.92 2394.51,924.41 2394.51,802.56 ; 2345,1252.56 2345,1309.65 ; 2345,1321.46 2396.46,1321.46 2407.01,1332.01 v1(2407.01,1425) 2407.01,1475 2397.07,1484.94 2345,1484.94 ; 2345,1390.35 v1@2345,1424.51 ; 2345,1540.06 v1@2345,1574.21 ; v1(2345,1625) 2382.28,1625 ; v1(2375,2537.5) 2375,2572.44 ; 2375,2627.56 2378.94,2627.56 2401.38,2650 v1(2425,2650) 2625,2650 ; 2375,2734.94 2378.94,2734.94 2401.38,2712.5 v1(2425,2712.5) 2625,2712.5 ; 2375,2790.06 v1(2375,2825) ; 2381.3,2100 v1(2475,2100) ; 2381.3,2150 v1(2437.5,2150) ; 2397.24,1787.5 2475,1787.5 v1(2500,1812.5) ; 2400,1750.1 2397.24,1750.1 ; 2413.39,-408.27 2345,-339.88 2345,370 2394.51,419.51 2394.51,802.56 ; v1@2462.5,1425 2462.99,1424.51 2462.99,1390.35 ; v1@2462.99,717.22 2462.99,747.44 ; 2462.99,802.56 2512.5,802.56 ; 2462.99,1128.54 v1@2462.99,1158.76 ; 2462.99,1197.44 2437.12,1197.44 2425.98,1186.3 2425.98,1084.28 2438.8,1071.46 2462.99,1071.46 2462.99,973.92 2512.5,924.41 2512.5,802.56 ; 2462.99,1252.56 2462.99,1318.75 ; 2462.99,1321.46 2515.63,1321.46 2525,1330.83 v1(2525,1425) 2525,1475 2515.06,1484.94 2462.99,1484.94 ; 2462.99,1540.06 v1@2462.99,1574.21 ; 2502.56,2200 v1(2502.56,2233.96) ; 2525,1680.12 2432.38,1680.12 2397.24,1715.26 2397.24,1750.1 ; 2550,806.79 v1@2550,837.01 ; 2578.74,-408.27 2466.23,-295.76 2466.23,-214.32 2466.72,-213.83 2466.72,366.72 2512.5,412.5 2512.5,802.56 ; v1(2625,2625) 2625,2650 ; v1(2625,2687.5) 2625,2712.5 ; v1@2675,514.67 2675,544.88 ; v1(2675,1875) 2709.94,1875 ; v1(2675,1937.5) 2709.94,1937.5 ; v1(2675,2000) 2709.94,2000 ; v1(2675,2062.5) 2709.94,2062.5 ; v1(2675,2250) 2709.94,2250 ; v1(2675,2312.5) 2709.94,2312.5 ; v1(2675,2462.5) 2709.94,2462.5 ; v1(2675,2525) 2709.94,2525 ; v1(2675,2587.5) 2709.94,2587.5 ; v1(2675,2775) 2709.94,2775 ; v1(2675,2837.5) 2709.94,2837.5 ; 2702,1800 2702.3,1800.3 ; 2709.94,2650 2625,2650 ; 2709.94,2712.5 2625,2712.5 ; 2712.5,1567.72 v1(2712.5,1601.67) ; 2725,747.44 2825,747.44 2925,747.44 3025,747.44 3125,747.44 3225,747.44 3325,747.44 3425,747.44 3525,747.44 3625,747.44 3725,747.44 3875,747.44 ; 2725,802.56 v1(2725,836.52) 2725,938.04 2675,988.04 2675,1101.24 2702.3,1128.54 2725,1128.54 2725,1197.44 ; v1(2725,1037.5) 2725,1071.46 ; 2725,1252.56 2725,1321.46 ; 2725,1378.54 v1(2725,1412.5) ; v1(2725,1709.25) 2725,1743.21 ; 2765.06,1875 v1(2818.75,1875) ; 2765.06,1937.5 v1(2818.75,1937.5) ; 2765.06,2000 v1(2818.75,2000) 2872.44,2000 ; 2765.06,2062.5 v1(2818.75,2062.5) 2872.44,2062.5 ; 2765.06,2125 v1(2818.75,2125) ; 2765.06,2187.5 v1(2818.75,2187.5) ; 2765.06,2250 v1(2818.75,2250) 2872.44,2250 ; 2765.06,2312.5 v1(2818.75,2312.5) 2872.44,2312.5 ; 2765.06,2400 v1(2818.75,2400) ; 2765.06,2462.5 v1(2818.75,2462.5) ; 2765.06,2525 v1(2818.75,2525) ; 2765.06,2587.5 v1(2818.75,2587.5) ; 2765.06,2650 v1(2818.75,2650) ; 2765.06,2712.5 v1(2818.75,2712.5) ; 2765.06,2775 2862.5,2775 2950,2687.5 v1(2950,2587.5) ; 2765.06,2837.5 v1(2818.75,2837.5) ; v1(2800,1709.25) 2800,1743.21 ; 2825,802.56 v1(2825,836.52) 2825,938.04 2775,988.04 2775,1101.24 2802.3,1128.54 2825,1128.54 2825,1197.44 ; v1(2825,1037.5) 2825,1071.46 ; 2825,1252.56 2825,1321.46 ; 2825,1378.54 v1(2825,1412.5) ; v1@2875,1719 2875,1743.21 ; 2925,802.56 v1(2925,836.52) 2925,938.04 2875,988.04 2875,1101.24 2902.3,1128.54 2925,1128.54 2925,1197.44 ; v1(2925,1037.5) 2925,1071.46 ; 2925,1252.56 2925,1321.46 ; 2925,1378.54 v1(2925,1412.5) ; 2925,2822.44 2925,2800 2950,2775 2997.44,2775 ; 2925,2877.56 2925,2900 2950,2925 2997.44,2925 ; 2927.56,1862.5 v1(2987.5,1862.5) 3004.04,1879.04 3156.59,1879.04 ; 2927.56,2250 2927.56,2246.06 3070.73,2102.89 3070.73,2088.96 v1(3072.19,2087.5) ; 2927.56,2312.5 3062.5,2312.5 v1(3100,2275) ; v1(2950,1709.25) 2950,1743.21 ; 2962.5,1667.62 3021.48,1667.62 3022.51,1668.65 v1@3022.51,1670.11 ; v1@3023.92,1708.71 3024.73,1709.52 3025,1709.79 3025,1743.21 ; 3025,802.56 v1(3025,836.52) 3025,938.04 2975,988.04 2975,1101.24 3002.3,1128.54 3025,1128.54 3025,1197.44 ; v1(3025,1037.5) 3025,1071.46 ; 3025,1252.56 3025,1321.46 ; 3025,1378.54 v1(3025,1412.5) ; 3025,1800.3 3156.59,1800.3 ; 3037.5,1567.72 v1(3037.5,1601.67) ; v1(3100,1575) 3150,1575 ; 3100,2050 v1(3100,2200) ; 3125,802.56 v1(3125,836.52) 3125,938.04 3075,988.04 3075,1101.24 3102.3,1128.54 3125,1128.54 3125,1197.44 ; v1(3125,1037.5) 3125,1071.46 ; 3125,1252.56 3125,1321.46 ; 3125,1378.54 v1(3125,1412.5) ; 3125,2334.65 3125,2289.33 3128.08,2286.26 3128.08,2251.71 3137.5,2242.28 v1(3137.5,2225) ; 3125,2400.59 v1(3125,2437.5) ; 3225,802.56 v1(3225,836.52) 3225,938.04 3175,988.04 3175,1101.24 3202.3,1128.54 3225,1128.54 3225,1197.44 ; v1(3225,1037.5) 3225,1071.46 ; 3225,1252.56 3225,1321.46 ; 3225,1378.54 v1(3225,1412.5) ; 3325,802.56 v1(3325,836.52) 3325,938.04 3275,988.04 3275,1101.24 3302.3,1128.54 3325,1128.54 3325,1197.44 ; v1(3325,1037.5) 3325,1071.46 ; 3325,1252.56 3325,1321.46 ; 3325,1378.54 v1(3325,1412.5) ; 3333.76,2115.26 3333.76,2053.74 v1@3337.5,2050 ; 3425,802.56 v1(3425,836.52) 3425,938.04 3375,988.04 3375,1101.24 3402.3,1128.54 3425,1128.54 3425,1197.44 ; v1(3425,1037.5) 3425,1071.46 ; 3425,1252.56 3425,1321.46 ; 3425,1378.54 v1(3425,1412.5) ; 3430.68,2300 v1(3464.64,2300) ; 3430.68,2375 v1(3462.5,2375) ; 3525,802.56 v1(3525,836.52) 3525,938.04 3475,988.04 3475,1101.24 3502.3,1128.54 3525,1128.54 3525,1197.44 ; v1(3525,1037.5) 3525,1071.46 ; 3525,1252.56 3525,1321.46 ; 3525,1378.54 v1(3525,1412.5) ; 3609.35,1741.24 3642.88,1741.24 3659.12,1725 v1(3925,1725) ; 3625,802.56 v1(3625,836.52) 3625,938.04 3575,988.04 3575,1101.24 3602.3,1128.54 3625,1128.54 3625,1197.44 ; v1(3625,1037.5) 3625,1071.46 ; 3625,1252.56 3625,1321.46 ; 3625,1378.54 v1(3625,1412.5) ; 3725,802.56 v1(3725,836.52) 3725,938.04 3675,988.04 3675,1101.24 3702.3,1128.54 3725,1128.54 3725,1197.44 ; v1(3725,1037.5) 3725,1071.46 ; 3725,1252.56 3725,1321.46 ; 3725,1378.54 v1(3725,1412.5) ; v1(3775,988.04) 3775,1101.24 3802.3,1128.54 3825,1128.54 3825,1197.44 ; 3812.5,804.53 v1(3812.5,838.48) ; v1(3825,1037.5) 3825,1071.46 ; 3825,1252.56 3825,1321.46 ; 3825,1378.54 v1(3825,1412.5) ; 3875,802.56 3949.02,802.56 3949.51,803.05 3950,803.54 v1(3950,837.5) ; v1(3875,988.04) 3875,1101.24 3902.3,1128.54 3925,1128.54 3925,1197.44 ; v1(3925,1037.5) 3925,1071.46 ; 3925,1252.56 3925,1321.46 ; 3925,1378.54 v1(3925,1412.5) ; 3950,745.47 v1(3950,711.52) 3988.48,711.52 4025,675 ; 3950,802.56 4025,802.56 ; v1(3975,988.04) 3975,1101.24 4002.3,1128.54 4025,1128.54 4025,1197.44 ; v1(4025,1037.5) 4025,1071.46 ; 4025,1252.56 4025,1321.46 ; 4025,1378.54 v1(4025,1412.5) ; v1(4075,988.04) 4075,1101.24 4102.3,1128.54 4125,1128.54 4125,1197.44 ; v1(4109.25,1065.55) 4110.71,1067.01 4120.55,1067.01 4125,1071.46 ; 4125,1252.56 4125,1321.46 ; 4125,1378.54 v1(4125,1412.5) ; 4275,727.56 4375,727.56 4375,850 4387.6,862.6 4387.6,922.24 ; 4275,821.06 v1(4275,862.5) ; 4375,672.44 4375,646.13 4404.92,616.2 4404.92,600 4404.92,545.08 4546.66,403.34 4546.66,252.79 4600,199.45 4600,91.73 ; v1(4387.6,1063.29) 4387.6,1097.24 4387.6,1137.6 4397.44,1147.44 4397.44,1175 4397.44,1196.72 4404.92,1204.2 4404.92,1250 v1(4404.92,1283.96) ; v2(4400,3125) 4433.96,3125 ; v1(4425,793.8) 4425,827.76 ; 4425,1002.76 4453.03,1002.76 4462.4,993.38 4462.4,922.24 4462.4,862.6 4475,850 4475,727.56 ; v1(4425,1377.56) 4475,1377.56 4475,1437.5 ; 4445.08,600 4475,600 ; 4462.4,1097.24 4462.4,1137.6 4452.56,1147.44 4452.56,1175 4452.56,1196.72 4445.08,1204.2 4445.08,1250 4447.32,1252.24 4447.32,1254.2 4475,1281.89 4475,1322.44 ; 4475,672.44 4475,600 ; 4475,2575 4521.45,2621.45 4521.45,2828.31 4509.69,2840.07 4509.69,3034.69 v1(4525,3050) ; 4491.04,3125 v1(4537.5,3125) 4584.94,3125 ; 4600,308.27 4600,492.99 4552.29,540.71 4552.29,560.71 4512.99,600 4475,600 ; 4640.06,3050 4640.06,3125 4687.01,3125 ; v1(4650,2337.5) 4650,2213.88 4709.94,2153.94 4709.94,2150 ; 4660.1,1772.24 4660.1,1727.11 4728.15,1659.06 ; 4687.5,3169.78 4687.5,3125.49 4687.01,3125 ; 4728.15,953.35 4728.15,884.35 4780.51,831.99 ; 4728.15,1495.85 4728.15,1575 4728.15,1618.26 4731.52,1621.63 v1@4732.82,1622.94 ; v1@4728.15,1622.94 v1(4728.15,1625) 4728.15,1659.06 ; 4728.15,1659.94 4728.15,1659.06 ; 4733.96,3125 4687.01,3125 ; v2(4787.5,3175) 4791.04,3171.46 4791.04,3125 v2(4825,3125) ; 4807.15,1495.85 4807.15,1575 ; 4807.15,1630.12 4807.15,1671.46 4807.15,1679.92 ; 4819.49,793.01 4837.5,775 4863.7,775 5029,609.7 5029,362.27 4975,308.27 ; 4886.15,822.44 4886.15,789.32 5055,620.47 5055,171.73 4975,91.73 ; 4886.15,877.56 4886.15,953.35 ; 4886.15,1495.85 4886.15,1575 v1(4886.15,1625) 4886.15,1659.94 4888.12,1659.94 4954.2,1726.02 4954.2,1772.24 ; 5285.1,1772.24 5285.1,1726.02 5351.18,1659.94 5353.15,1659.94 v1(5353.15,1625) 5353.15,1575 5353.15,1495.85 ; 5350,91.73 5445.15,186.88 5445.15,813.07 5454.52,822.44 5511.15,822.44 ; 5350,308.27 5419.15,377.42 5419.15,813.07 5409.78,822.44 5353.15,822.44 ; 5353.15,877.56 5353.15,953.35 ; 5432.15,1495.85 5432.15,1575 ; 5432.15,1630.12 5432.15,1671.46 5432.15,1679.9 ; 5511.15,877.56 5511.15,953.35 ; 5511.15,1495.85 5511.15,1575 v1(5511.15,1625) 5511.15,1659.94 5513.12,1659.94 5579.2,1726.02 5579.2,1772.24 ; v1(5700,2587.5) 5737.5,2625 5912.5,2625 5962.5,2575 ; 5725,91.73 5668.69,148.04 5668.69,593.69 5822.24,747.24 5887.6,747.24 5962.4,747.24 6009.74,747.24 6063.58,801.08 6063.58,837.5 6063.58,853.7 6072.24,862.37 6072.24,962.01 ; 5725,308.27 5725,492.99 5788.92,492.99 5925,629.07 5925,652.76 5977.76,652.76 6103.74,778.74 6103.74,837.5 6103.74,962.01 ; 5897.24,1615.06 5905.12,1615.06 5934.67,1644.61 5934.67,1680.73 5975,1721.06 ; v1(5925,1550) 5925,1514.41 6040.75,1398.66 6040.75,1337.99 ; 5975,1615.06 5975,1675 5975,1721.06 ; 5975,1725 5975,1721.06
  Top Copper w20: 5225,2217.72 5225,2250.5 5238.25,2263.76 5286.89,2263.76 5289.47,2266.34 5337.5,2266.34
  Top Copper w24: v1(562.5,962.5) 562.5,929.12 576.56,915.06 605,915.06 ; v1(605,716.73) 567.89,753.84 567.89,826.77 601.06,859.94 605,859.94 ; 1400,802.56 1472.44,802.56 1473.72,801.28 v1@1475,800 ; 1690.06,3050 v1(1750,3050) ; v1(1712.5,962.5) 1712.5,929.12 1726.56,915.06 1755,915.06 ; v1(1755,716.73) 1726.56,716.73 1712.5,730.79 1712.5,821.38 1751.06,859.94 1755,859.94 ; 1988.09,2817.62 v1(1988.09,2887.5) ; v1(2223.33,2674.9) 2223.43,2675 2259.94,2675 ; 2462.99,1625 2525,1625 2525,1575 v1(2537.5,1562.5) ; v1(2525,2400) 2709.94,2400 ; 2550,747.44 2575,747.44 ; 2575,650 v1(2575,716.73) 2583.72,725.45 2583.72,1208.37 2575,1217.08 v1(2575,1700) 2675,1800 2702,1800 ; 2637.5,1550.79 2677.66,1510.63 2712.5,1510.63 2776.08,1510.63 ; 2702.3,1800.3 2725,1800.3 2800,1800.3 2875,1800.3 2950,1800.3 ; 3131.7,2343.5 3212.5,2343.5 ; v1(3162.5,2687.5) 3225,2687.5 ; 3212.5,2398.62 3212.5,2463.13 3225,2475.63 3225,2507.18 v1(3287.5,2507.18) ; 3218.22,2343.5 3298.11,2343.5 v1(3341.61,2300) 3375.57,2300 ; 3678.45,1850.3 3686.61,1850.3 3697.01,1860.7 3726.8,1860.7 ; 3678.45,1968.41 3685.64,1968.41 3700.6,1983.37 3704.85,1983.37 ; v1(4362.5,2787.5) 4362.5,2587.5 4475,2475 ; v1(4525,3050) 4584.94,3050 ; 4862.5,2084.94 v1(4893.75,2084.94) 4925,2084.94 ; 5000,2179.92 5020.08,2179.92 v1(5025,2175) 5027.56,2177.56 5062.5,2177.56 ; 5387.5,2127.56 v1(5387.5,2162.5)
  Top Copper w30: v1(1012.5,2987.5) 1750,2987.5 1787.5,3025 2225,3025 2252.69,2997.31 3057.37,2997.31 3154.68,2900 v1(3737.5,2900) ; v1(1962.5,3125) 2812.5,3125 2884.81,3052.69 3734.81,3052.69 v1(3862.5,2925) ; 2162.8,2539.79 v1(2214.17,2539.79) 2214.17,2490.43 ; v1(2637.5,1412.5) 2637.5,1475 ; 2637.5,1550.79 2637.5,1568.5 ; v1(2712.5,1637.5) 2777.46,1637.5 ; 2776.08,1510.63 v1(2776.08,1557.38) v1(2913.04,1557.38) ; 2848.92,1510.63 3037.5,1510.63 3150,1510.63 3185.63,1510.63 v1(3212.5,1537.5) ; 2870.96,1637.5 2870.96,1599.46 v1(2913.04,1557.38) ; 2962.5,1557.38 v1(2913.04,1557.38) ; v1(3212.5,2597.34) 3412.01,2597.34 ; 3475,2199.23 3485.58,2209.81 3812.88,2209.81 3932.51,2090.19 4165.38,2090.19 4352.88,1902.69 4447.31,1902.69 v1@4562.5,1787.5 ; 3547.78,2160.28 3640.49,2160.28 3760.58,2040.19 4167.3,2040.19 4424.23,1783.26 v1(4425,1783.26) ; v1(3600,1575) 3691.54,1575 ; 3704.85,1983.37 4074.89,1983.37 v1(4275,1783.26) ; 3726.8,1860.7 3997.56,1860.7 v1(4075,1783.26) ; 4712.5,2765.06 v1(4712.5,2812.5) ; 4765.06,1987.5 v1(4765.06,2037.5) 4765.06,2087.5 4765.06,2150 ; 4975,2775 4975,2844.93 4992.57,2862.5 5209.99,2862.5 5227.56,2844.93 5227.56,2812.5 ; 5050,2369.78 5050,2400 5082.28,2432.28 5125,2432.28 ; 5062.5,2217.72 v1(5093.75,2217.72) 5125,2217.72 ; v1(5162.5,2512.5) 5175,2500 5175,2432.28 ; 5225,2432.28 5225,2551.28 5311.22,2637.5 5313.19,2637.5 ; 5485.73,2712.5 5485.73,2620.08 5511.42,2594.39 5511.42,2587.5 ; 5512.5,2065.06 5544.72,2065.06 5554.66,2075 5572.44,2075 ; 5627.56,2075 5655.84,2075 5665.78,2065.06 5687.5,2065.06
  Signal Layer 1 w6: v1(4075,988.04) 4275.54,988.04 4550,1262.5 4550,1575 4575,1600 6112.5,1600 6253.68,1741.18 6253.68,3197.63 6250,3201.31 v1(6250,3300)
  Signal Layer 1 w12: v1(986.17,2090.75) 960.36,2116.56 960.36,2163.94 986.36,2189.94 996.86,2189.94 1110.98,2304.06 1128.75,2304.06 1209.03,2384.34 1209.03,2391.6 1269.45,2452.01 1269.45,2744.45 1325,2800 ; v1(986.17,2153.25) 1085.36,2252.44 1142.88,2252.44 1314.15,2423.71 1314.15,2689.15 1325,2700 ; v1(986.17,2215.75) 960.36,2241.56 960.36,2288.94 986.36,2314.94 996.86,2314.94 1110.98,2429.06 1128.75,2429.06 1171.43,2471.74 1171.43,2746.43 1225,2800 ; v1(986.17,2278.25) 1074.48,2366.56 1128.75,2366.56 1225,2462.81 1225,2700 ; v1(986.17,2340.75) 960.36,2366.56 960.36,2413.94 986.36,2439.94 996.86,2439.94 1069.46,2512.53 1069.46,2744.46 1125,2800 ; v1(986.17,2403.25) 1085.46,2502.53 1085.46,2660.46 1125,2700 ; v1(986.17,2465.75) 960.36,2491.56 960.36,2735.35 1025.01,2800 ; v1(986.17,2528.25) 1025.01,2567.08 1025.01,2700 ; 1425,2700 1425,2516.23 1600.81,2340.42 1600.81,2334.34 1681.09,2254.06 1691.6,2254.06 1823.67,2121.98 v1(1823.67,2103.25) ; 1425,2800 1480.55,2744.45 1480.55,2548.57 1499.19,2529.93 1499.19,2498.46 1670.21,2327.44 1680.72,2327.44 1823.67,2184.48 v1(1823.67,2165.75) ; 1525,2700 1564.55,2660.45 1564.55,2495.6 1681.09,2379.06 1691.6,2379.06 1823.67,2246.98 v1(1823.67,2228.25) ; 1525,2800 1580.55,2744.45 1580.55,2542.1 1681.09,2441.56 1691.6,2441.56 1823.67,2309.48 v1(1823.67,2290.75) ; 1625,2700 1625,2560.15 1681.09,2504.06 1691.6,2504.06 1823.67,2371.98 v1(1823.67,2353.25) ; 1625,2800 1680.55,2744.45 1680.55,2577.6 1728.67,2529.49 1728.67,2510.75 v1(1823.67,2415.75) ; 1725,2700 1725,2576.92 v1(1823.67,2478.25) ; 1725,2800 1778.67,2746.33 1778.67,2585.75 v1(1823.67,2540.75) ; v1(2625,1812.5) 2625,2412.5 v1(2675,2462.5) ; v1(3087.5,1648.19) 3130.41,1648.19 3194.92,1712.71 3194.92,2248.79 3193.31,2250.4 3193.31,2253.54 3187.5,2259.35 v1(3187.5,2262.5) ; v1(3087.5,1679.81) 3117.31,1679.81 3163.31,1725.81 3163.31,2235.69 3155.89,2243.12 v1(3155.89,2263.23) ; v1(5725,1712.5) 5775,1712.5 6112.5,2050 6112.5,2325 6062.5,2375
  Signal Layer 1 w16: v1@300,3000 v1(300,2999.9) 300,2926.83 322.19,2904.64 322.19,2815.31 v1(400,2737.5) ; v1@350,2887.5 v1(352.76,2887.5) 487.5,2752.76 v1(487.5,2712.5) ; v1(549.02,1425) 549.02,1761.52 652.32,1864.82 724.75,1864.82 v2(725,1864.57) ; v2(650,1800) 650,1559.36 667.01,1542.35 v1(667.01,1425) ; v2(725,1813.39) 785,1753.39 v1(785,1425) ; v1(725,2712.5) 812.5,2625 v1(812.5,2437.5) ; v2(844.69,1787.8) 902.99,1729.49 v1(902.99,1425) ; v2(955.32,1838.98) 925,1808.66 925,1662.5 1021.02,1566.48 v1(1021.02,1425) ; v2(1075,1813.39) 1145.92,1742.46 1145.92,1534.48 1137.01,1525.56 v1(1137.01,1425) ; v2(1175,1787.5) 1257.01,1705.49 v1(1257.01,1425) ; v2(1350,1762.5) 1375,1737.5 v1(1375,1425) ; v1(1387.5,2525) 1477.81,2434.69 1477.81,1970.7 1475,1967.89 v1(1475,1587.5) ; v2(1625,2237.5) 1625,1933.04 1609.2,1917.24 1609.2,1602.52 v1(1637.01,1574.7) ; v1(1699.02,1425) 1699.02,1761.52 1800,1862.5 v2(1837.5,1862.5) ; v1(1700,1909.69) 1700,1912.5 1902.16,2114.66 v1(1902.16,2260.11) ; v1@1739.23,3123.27 1740.96,3123.27 1900,2964.23 v1(1900,2750) ; v2(1800,1800) 1800,1559.36 1817.01,1542.35 v1(1817.01,1425) ; v1(1862.5,2000) 1863.34,1999.16 1863.34,1851.8 1849.16,1837.61 1849.16,1700.32 1872.99,1676.48 v1(1872.99,1574.7) ; v2(1875,1813.39) 1935,1753.39 v1(1935,1425) ; v1(1987.5,2000) 1987.5,1868.34 1968.84,1849.68 1968.84,1674.73 1991,1652.57 v1(1990.98,1574.7) ; v2(1994.69,1787.8) 2052.99,1729.49 v1(2052.99,1425) ; v1(2025,1925) v1(2025,2100) ; v1(2062.5,1887.5) 2062.5,2037.53 v1(2089.22,2064.25) ; v1(2062.5,2825) 2063.96,2823.54 2074.63,2823.54 2075.98,2822.19 2209.69,2822.19 v1(2237.5,2850) ; v2(2105.32,1838.98) 2171.02,1773.27 v1(2171.02,1425) ; v1(2109.02,1574.7) 2075,1608.72 2075,1845.21 2137.5,1907.71 v1(2137.5,1987.5) ; v1(2200,1987.5) 2199.16,1986.66 2199.16,1600.55 v1(2225,1574.7) ; v2(2225,1813.39) 2295.92,1742.46 2295.92,1534.48 2287.01,1525.56 v1(2287.01,1425) ; v1(2250,1912.5) 2299.16,1863.34 2299.16,1774.21 2372.81,1700.55 2372.81,1602.52 v1(2345,1574.7) ; v2(2325,1787.5) 2407.01,1705.49 v1(2407.01,1425) ; v1(2425,2650) 2425,2162.5 v1(2437.5,2150) ; v1(2425,2712.5) 2475,2662.5 2475,2367.59 2474.75,2367.34 2474.75,2100.25 v1(2475,2100) ; v1(2462.5,1862.47) 2462.75,1862.23 2462.75,1574.95 v1(2462.99,1574.7) ; v2(2500,1762.5) 2500,1450 v1(2525,1425) ; v1(2625,2625) 2652.81,2652.81 2652.81,2722.19 2634.69,2740.31 v1(2625,2740.31) ; v1(2818.75,1875) 3062.5,2118.75 v1(3062.5,2400) ; v1(2818.75,1937.5) 3025,2143.75 v1(3025,2462.5) ; v1(2818.75,2000) 2987.5,2168.75 v1(2987.5,2525) ; v1(2818.75,2062.5) 2950,2193.75 v1(2950,2587.5) ; v1(2818.75,2125) 2912.5,2218.75 v1(2912.5,2650) ; v1(2818.75,2187.5) 2875,2243.75 v1(2875,2712.5) ; v1(2818.75,2250) 2790.94,2277.81 2790.94,2559.69 v1(2818.75,2587.5) ; v1(2818.75,2312.5) 2818.75,2360.67 2846.56,2388.48 2846.56,2809.69 v1(2818.75,2837.5) ; v1(2837.5,1837.5) 2872.03,1837.5 2984.88,1950.34 3015.78,1950.34 3018.12,1948 3049.02,1948 3137.5,2036.48 v1(3137.5,2225) ; v1(2957.3,1415.92) 2957.3,1624.11 2987.5,1654.31 v1(2987.5,1862.5) ; v1(3925,1725) 3952.81,1697.19 3952.81,1025.98 3947.19,1020.36 3947.19,920.97 3950,918.16 v1(3950,837.5) ; v1(4137.5,1475) v1(4137.5,1562.5) ; v1(4175,1475) v1(4175,1600) ; v1(4425,1377.56) 4509.81,1462.36 4509.81,1974.51 4428.55,2055.76 4428.55,2328.55 4475,2375 ; v1(4537.5,2875) 4537.5,2984.69 4552.81,3000 4552.81,3109.69 v1(4537.5,3125)
  Signal Layer 1 w24: v1(350,1300) 350,1175 v1(562.5,962.5) ; v1(1500,1300) 1500,1175 v1(1712.5,962.5) ; v1(2462.99,716.73) 2550,803.74 v1(2550,837.5) ; v1(2525,2400) 2537.5,2387.5 v1(2537.5,1562.5) ; v1(2550,950) 2562.5,950 2605.69,993.19 2605.69,1634.93 2808.26,1837.5 v1(2837.5,1837.5) ; v1(2575,1700) v1(2575,3050) ; v1(3162.5,2300) v1(3162.5,2687.5) ; v1(3287.5,2507.18) 3373.42,2421.26 3373.42,2198.42 v1(3362.5,2187.5) ; v1(3700,2787.5) v1(3700,2862.5)